# Altium PCB STM32.PcbDoc (part 4 of 6)
Units mm, origin at the board's own origin, x right, y up, seen from the top; angles counter-clockwise.
Board outline 99.69 x 99.7 mm, 2 copper layers (Top Layer, Bottom Layer); 150 components, 142 nets, 668 pads, 273 vias.
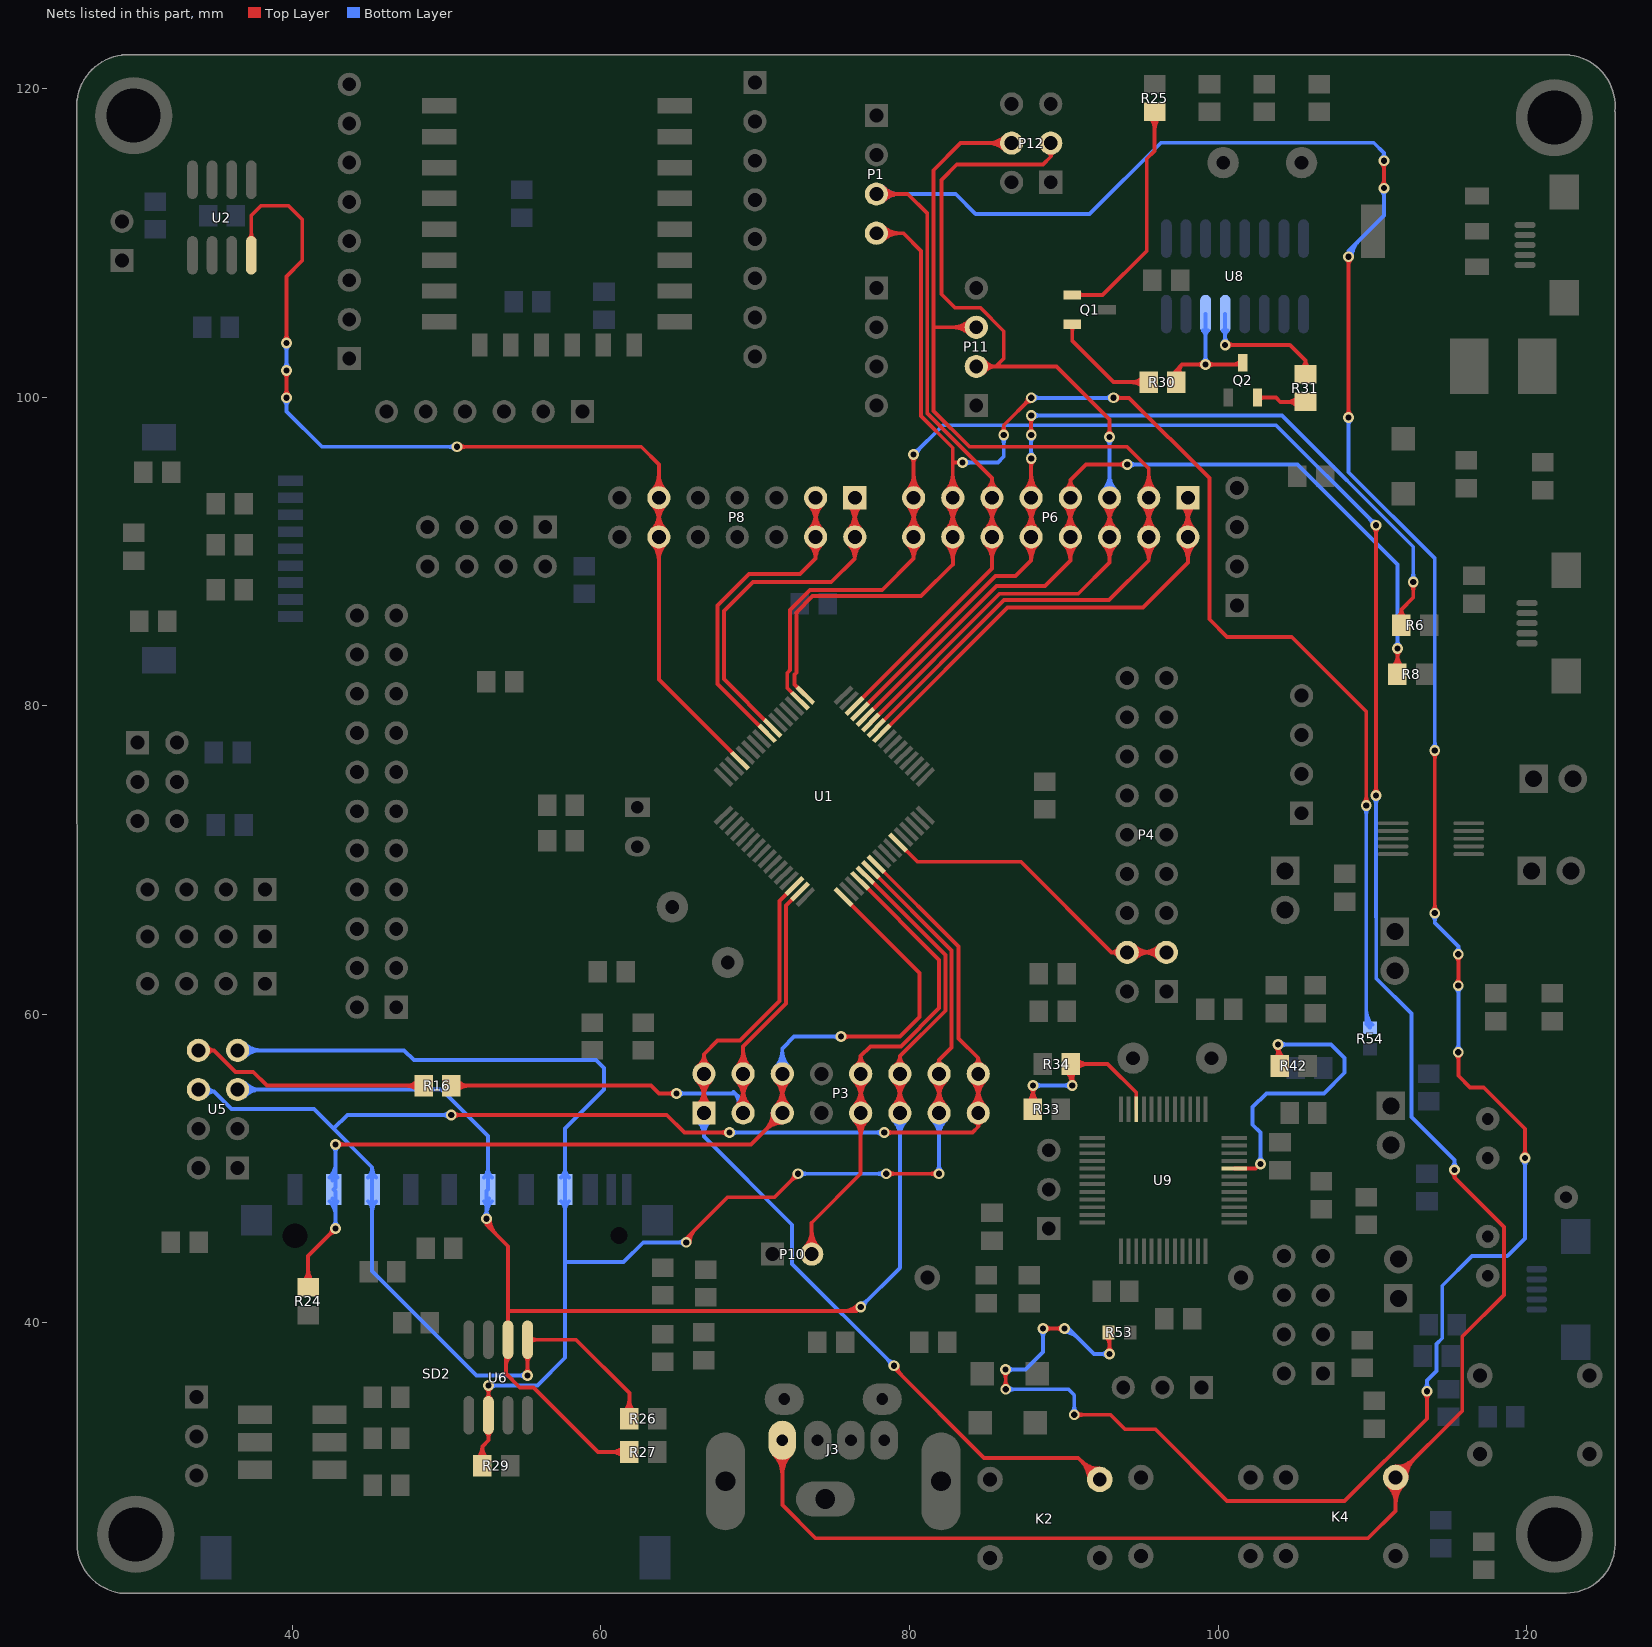
[diagram p4: the nets of this part, all layers, seen from the top]

## Via types
v1: diameter 0.7, hole 0.4, Top Layer to Bottom Layer, 272 vias
v2: diameter 1.27, hole 0.711, Top Layer to Bottom Layer, 1 vias

## Nets (pads, with @x,y where several pads share a name; then routed paths per layer and width w, separated by ;. In a path a pad name is that pad's centre, name@x,y a point inside that pad or via, vN(x,y) a via of type N, cw(c..) or ccw(c..) an arc to the next point about the centre after c; other vN are vias at no path point) (continued)
NetQ1_1: Q1.1 R25.1 | length 17.7
  Top Layer w0.25: Q1.1@90.551,106.614 92.517,106.614 95.377,109.474 95.377,115.443 95.885,115.951 R25.1@95.885,118.48 ; Q1.1@90.95,106.49 cw(c91.248,106.192) 91.248,106.614 cw(c91.248,107.036) Q1.1@90.95,106.738 ; R25.1@95.549,118.144 cw(c94.738,117.333) 95.885,117.333 cw(c97.032,117.333) R25.1@96.221,118.144
NetQ1_2: Q1.2 R30.1 | length 9.6
  Top Layer w0.25: Q1.2@90.427,104.59 cw(c90.129,104.292) 90.551,104.292 cw(c90.973,104.292) Q1.2@90.675,104.59 ; Q1.2@90.551,104.714 90.551,103.632 93.218,100.965 R30.1@95.493,100.965 ; R30.1@95.157,100.629 ccw(c94.346,99.818) 94.346,100.965 ccw(c94.346,102.112) R30.1@95.157,101.301
NetQ2_2: Q2.2 R31.1 | length 5.8
  Top Layer w0.25: Q2.2@102.55,99.967 103.741,99.967 104.024,99.684 R31.1@105.664,99.684 R31.1@105.664,99.568 ; Q2.2@102.674,99.843 cw(c102.972,99.544) 102.972,99.967 cw(c102.972,100.389) Q2.2@102.674,100.091 ; R31.1@105.228,99.348 ccw(c104.417,98.537) 104.417,99.684 ccw(c104.417,100.831) R31.1@105.228,100.02
NetQ2_3: Q2.3 R30.2 U8.14 | length 15.4
  Top Layer w0.25: R30.2@97.134,101.513 ccw(c97.054,101.738) 97.293,101.738 ; R30.2@97.274,101.048 cw(c97.645,101.383) 97.292,101.737 ; R30.2@97.293,100.965 97.293,101.738 ; R30.2@97.452,101.513 cw(c97.532,101.738) 97.293,101.738 ; R30.2@97.46,101.216 cw(c97.84,101.56) 97.477,101.922 ; R30.2@97.645,101.384 cw(c98.034,101.737) 97.663,102.108 ; v1@99.028,101.949 ccw(c98.644,101.565) 98.644,102.108 ccw(c98.644,102.651) v1@99.028,102.267 ; v1@99.346,101.949 cw(c99.73,101.565) 99.73,102.108 cw(c99.73,102.651) v1@99.346,102.267 ; 100.914,102.108 ccw(c100.914,102.903) Q2.3@101.476,102.341 ; Q2.3@101.491,102.108 v1(99.187,102.108) 97.663,102.108 ; 97.293,101.738 97.663,102.108
  Bottom Layer w0.25: v1@99.028,102.267 ccw(c98.644,102.651) 99.187,102.651 ccw(c99.73,102.651) v1@99.346,102.267 ; U8.14@99.028,104.314 cw(c98.644,103.93) 99.187,103.93 cw(c99.73,103.93) U8.14@99.346,104.314 ; v1(99.187,102.108) U8.14@99.187,105.373
NetR16_1: R16.1 U5.8 | length 18.5
  Top Layer w0.254: U5.8@33.909,57.658 34.925,57.658 ; U5.8@34.464,57.375 cw(c34.925,57.141) 34.925,57.658 ; U5.8@34.464,57.941 ccw(c34.925,58.175) 34.925,57.658 ; R16.1@48.169,55.038 ccw(c47.361,54.23) 47.361,55.372 ccw(c47.361,56.514) R16.1@48.169,55.706 ; R16.1@48.503,55.372 38.354,55.372 37.465,56.261 36.322,56.261 34.925,57.658
NetR31_2: R31.2 U8.13 | length 12.2
  Top Layer w0.25: v1(100.457,103.378) 104.648,103.378 105.664,102.362 ; v1@100.616,103.219 cw(c101,102.835) 101,103.378 cw(c101,103.921) v1@100.616,103.537 ; R31.2@105.404,101.882 ccw(c105.09,102.362) 105.664,102.362 ; R31.2@105.664,101.484 105.664,102.362 ; R31.2@105.924,101.882 cw(c106.238,102.362) 105.664,102.362
  Bottom Layer w0.25: v1@100.298,103.537 ccw(c99.914,103.921) 100.457,103.921 ccw(c101,103.921) v1@100.616,103.537 ; U8.13@100.298,104.314 cw(c99.914,103.93) 100.457,103.93 cw(c101,103.93) U8.13@100.616,104.314 ; v1(100.457,103.378) U8.13@100.457,105.373
NetR33_1: R33.1 R34.2 U9.10 | length 20.7
  Top Layer w0.254: R33.1@87.666,54.282 ccw(c86.858,55.09) 88,55.09 ccw(c89.142,55.09) R33.1@88.334,54.282 ; v1@87.853,55.214 cw(c87.499,54.86) 88,54.86 ; R33.1@88,53.848 88,55.361 v1(88.011,55.372) ; 88,54.807 cw(c88.576,54.807) v1@88.169,55.214 ; R34.2@90.123,56.314 cw(c89.29,55.367) v1@90.551,55.367 ; R34.2@90.29,56.505 cw(c89.784,55.928) 90.551,55.928 ; v1@90.393,55.53 ccw(c90.013,55.91) 90.551,55.91 ccw(c91.089,55.91) v1@90.709,55.53 ; R34.2@90.435,56.769 92.837,56.769 94.694,54.912 U9.10@94.694,53.837 ; v1(90.551,55.372) R34.2@90.551,56.653 ; 90.551,55.807 cw(c91.297,55.807) R34.2@90.769,56.335 ; R34.2@90.769,56.435 cw(c91.577,55.627) 91.577,56.769 cw(c91.577,57.911) R34.2@90.769,57.103
  Bottom Layer w0.254: v1(88.011,55.372) v1(90.551,55.372) ; v1@88.169,55.214 cw(c88.549,54.834) 88.549,55.372 cw(c88.549,55.91) v1@88.169,55.53 ; v1@90.393,55.214 ccw(c90.013,54.834) 90.013,55.372 ccw(c90.013,55.91) v1@90.393,55.53
NetR42_2: R42.2 U9.44 | length 24.5
  Top Layer w0.254: U9.44@101.044,49.987 102.438,49.987 v1(102.743,50.292) ; R42.2@103.668,57.076 ccw(c103.14,57.604) 103.886,57.604 ; v1@103.728,57.881 cw(c103.348,57.501) 103.886,57.501 cw(c104.424,57.501) v1@104.044,57.881 ; 103.886,57.48 ccw(c104.647,57.48) R42.2@104.146,56.907 ; R42.2@104.002,56.642 103.886,56.758 v1(103.886,58.039) ccw(c105.135,58.039) R42.2@104.313,57.098
  Bottom Layer w0.254: v1@102.585,50.45 ccw(c102.205,50.83) 102.743,50.83 ccw(c103.281,50.83) v1@102.901,50.45 ; v1(102.743,50.292) 102.743,52.324 102.235,52.832 102.235,53.975 103.124,54.864 106.862,54.864 108.204,56.206 108.204,57.15 107.315,58.039 v1(103.886,58.039) ; v1@104.044,57.881 cw(c104.424,57.501) 104.424,58.039 cw(c104.424,58.577) v1@104.044,58.197
NIRQ: P3.3 P3.4 R16.2 U1.15 | length 54.2
  Top Layer w0.25: P3.3@68.773,54.036 ccw(c67.706,55.103) 69.215,55.103 ccw(c70.724,55.103) P3.3@69.657,54.036 ; P3.4@68.773,55.692 cw(c67.706,54.625) 69.215,54.625 cw(c70.724,54.625) P3.4@69.657,55.692 ; P3.3@68.95,53.859 ccw(c68.31,54.499) 69.215,54.499 ccw(c70.12,54.499) P3.3@69.48,53.859 ; P3.4@68.95,55.869 cw(c68.31,55.229) 69.215,55.229 cw(c70.12,55.229) P3.4@69.48,55.869 ; P3.3@69.215,53.594 P3.4@69.215,56.134
  Top Layer w0.254: R16.2@50.303,55.372 63.246,55.372 63.754,54.864 v1(64.897,54.864) ; R16.2@50.637,55.038 cw(c51.445,54.23) 51.445,55.372 cw(c51.445,56.514) R16.2@50.637,55.706 ; v1@64.739,54.706 ccw(c64.359,54.326) 64.359,54.864 ccw(c64.359,55.402) v1@64.739,55.022 ; P3.4@68.774,56.575 ccw(c67.711,57.638) 69.215,57.638 ccw(c70.719,57.638) P3.4@69.656,56.575 ; P3.4@68.954,56.395 ccw(c68.324,57.025) 69.215,57.025 ccw(c70.106,57.025) P3.4@69.476,56.395 ; P3.4@69.215,56.134 69.215,57.912 71.984,60.681 71.984,67.037 U1.15@72.895,67.948
  Bottom Layer w0.254: v1(64.897,54.864) 68.707,54.864 69.215,54.356 P3.3@69.215,53.594 ; v1@65.055,54.706 cw(c65.435,54.326) 65.435,54.864 cw(c65.435,55.402) v1@65.055,55.022 ; 68.604,54.967 cw(c67.777,54.14) P3.3@68.87,53.725 ; 68.881,54.69 cw(c68.179,53.987) P3.3@69.107,53.635 ; 69.159,54.412 cw(c68.582,53.835) P3.3@69.345,53.545
PA0: K2.2 P3.1 P3.2 U1.14 | length 76.1
  Top Layer w0.25: P3.1@66.233,54.036 ccw(c65.166,55.103) 66.675,55.103 ccw(c68.184,55.103) P3.1@67.117,54.036 ; P3.2@66.233,55.692 cw(c65.166,54.625) 66.675,54.625 cw(c68.184,54.625) P3.2@67.117,55.692 ; P3.2@66.294,56.629 ccw(c65.697,57.404) 66.675,57.404 ; P3.1@66.41,53.859 ccw(c65.77,54.499) 66.675,54.499 ccw(c67.58,54.499) P3.1@66.94,53.859 ; P3.2@66.41,55.869 cw(c65.77,55.229) 66.675,55.229 cw(c67.58,55.229) P3.2@66.94,55.869 ; P3.2@66.446,56.431 ccw(c66.088,56.896) 66.675,56.896 ccw(c67.262,56.896) P3.2@66.904,56.431 ; P3.1@66.675,53.594 P3.2@66.675,56.134 66.675,57.404 ; P3.2@67.056,56.629 cw(c67.653,57.404) 66.675,57.404 ; U1.14@72.541,68.302 71.579,67.34 71.579,60.848 69.024,58.293 67.564,58.293 66.675,57.404 ; v1(78.994,37.211) 78.994,37.084 84.836,31.242 90.932,31.242 K2.2@92.329,29.845 ; v1@79.219,37.211 ccw(c80.069,37.211) 79.468,36.61 ; K2.2@91.628,29.845 ccw(c89.935,29.845) 91.132,31.042 ccw(c92.329,32.239) K2.2@92.329,30.546 ; K2.2@91.878,29.845 ccw(c90.789,29.845) 91.559,30.615 ccw(c92.329,31.385) K2.2@92.329,30.296
  Bottom Layer w0.25: P3.1@66.233,53.152 cw(c65.166,52.085) 66.675,52.085 cw(c68.184,52.085) P3.1@67.117,53.152 ; P3.1@66.41,53.329 cw(c65.77,52.689) 66.675,52.689 cw(c67.58,52.689) P3.1@66.94,53.329 ; P3.1@66.675,53.594 66.675,52.07 72.39,46.355 72.39,43.815 v1(78.994,37.211) ; v1@78.769,37.211 ccw(c78.226,37.211) 78.61,37.595 ccw(c78.994,37.979) v1@78.994,37.436
PA3: P3.5 P3.6 R24.2 SD2.1 U1.17 | length 89.7
  Top Layer w0.25: R24.2@40.685,42.638 ccw(c39.874,43.449) 41.021,43.449 ccw(c42.168,43.449) R24.2@41.357,42.638 ; R24.2@41.021,42.302 41.021,44.323 v1(42.799,46.101) ; v1@42.574,46.101 cw(c42.031,46.101) 42.415,45.717 cw(c42.799,45.333) v1@42.799,45.876 ; v1(42.799,51.562) 69.723,51.562 P3.5@71.755,53.594 P3.6@71.755,56.134 ; v1@42.958,51.403 cw(c43.342,51.019) 43.342,51.562 cw(c43.342,52.105) v1@42.958,51.721 ; P3.5@71.13,53.594 cw(c69.621,53.594) 70.688,52.527 cw(c71.755,51.46) P3.5@71.755,52.969 ; P3.5@71.313,54.036 ccw(c70.246,55.103) 71.755,55.103 ccw(c73.264,55.103) P3.5@72.197,54.036 ; P3.6@71.313,55.692 cw(c70.246,54.625) 71.755,54.625 cw(c73.264,54.625) P3.6@72.197,55.692 ; P3.5@71.38,53.594 cw(c70.475,53.594) 71.115,52.954 cw(c71.755,52.314) P3.5@71.755,53.219 ; P3.5@71.49,53.859 ccw(c70.85,54.499) 71.755,54.499 ccw(c72.66,54.499) P3.5@72.02,53.859 ; P3.6@71.49,55.869 cw(c70.85,55.229) 71.755,55.229 cw(c72.66,55.229) P3.6@72.02,55.869 ; v1(75.565,58.547) 79.375,58.547 80.645,59.817 80.645,62.673 U1.17@75.723,67.595 ; v1@75.724,58.388 cw(c76.108,58.004) 76.108,58.547 cw(c76.108,59.09) v1@75.724,58.706
  Bottom Layer w0.25: SD2.1@42.407,47.876 cw(c41.46,46.929) 42.799,46.929 ; SD2.1@42.407,49.406 ccw(c41.46,50.353) 42.799,50.353 ; SD2.1@42.584,48.053 cw(c42.064,47.533) 42.799,47.533 ; SD2.1@42.584,49.229 ccw(c42.064,49.749) 42.799,49.749 ; v1@42.64,46.26 ccw(c42.256,46.644) 42.799,46.644 ccw(c43.342,46.644) v1@42.958,46.26 ; v1@42.64,51.403 cw(c42.256,51.019) 42.799,51.019 cw(c43.342,51.019) v1@42.958,51.403 ; v1(42.799,46.101) 42.799,48.514 SD2.1@42.672,48.641 42.799,48.768 v1(42.799,51.562) ; 42.799,47.542 cw(c43.271,47.542) SD2.1@42.937,47.876 ; 42.799,49.74 ccw(c43.271,49.74) SD2.1@42.937,49.406 ; P3.6@71.313,56.576 ccw(c70.246,57.643) 71.755,57.643 ccw(c73.264,57.643) P3.6@72.197,56.576 ; P3.6@71.49,56.399 ccw(c70.85,57.039) 71.755,57.039 ccw(c72.66,57.039) P3.6@72.02,56.399 ; P3.6@71.755,56.134 71.755,57.785 72.517,58.547 v1(75.565,58.547) ; v1@75.406,58.388 ccw(c75.022,58.004) 75.022,58.547 ccw(c75.022,59.09) v1@75.406,58.706
PA4: P3.9 P3.10 P10.2 U1.20 | length 47.5
  Top Layer w0.25: P3.9@76.393,54.036 ccw(c75.326,55.103) 76.835,55.103 ccw(c78.344,55.103) P3.9@77.277,54.036 ; P3.10@76.393,55.692 cw(c75.326,54.625) 76.835,54.625 cw(c78.344,54.625) P3.10@77.277,55.692 ; P3.9@76.57,53.859 ccw(c75.93,54.499) 76.835,54.499 ccw(c77.74,54.499) P3.9@77.1,53.859 ; P3.10@76.57,55.869 cw(c75.93,55.229) 76.835,55.229 cw(c77.74,55.229) P3.10@77.1,55.869 ; P3.9@76.835,53.594 P3.10@76.835,56.134
  Top Layer w0.254: P10.2@73.219,44.891 ccw(c72.156,45.954) 73.66,45.954 ccw(c75.164,45.954) P10.2@74.101,44.891 ; P10.2@73.399,44.711 ccw(c72.769,45.341) 73.66,45.341 ccw(c74.551,45.341) P10.2@73.921,44.711 ; P10.2@73.66,44.45 73.66,46.482 76.835,49.657 P3.9@76.835,53.594 ; P3.9@76.394,53.153 cw(c75.331,52.09) 76.835,52.09 cw(c78.339,52.09) P3.9@77.276,53.153 ; P3.10@76.497,56.658 ccw(c76.098,57.277) 76.835,57.277 ; P3.9@76.574,53.333 cw(c75.944,52.703) 76.835,52.703 cw(c77.726,52.703) P3.9@77.096,53.333 ; U1.20@76.784,68.655 81.915,63.524 81.915,60.392 79.435,57.912 77.47,57.912 76.835,57.277 ; P3.10@76.835,56.134 76.835,57.277 ; P3.10@77.173,56.658 cw(c77.572,57.277) 76.835,57.277
PA5: P3.11 P3.12 R27.2 SD2.5 U1.21 U5.5 U6.6 | length 126.7
  Top Layer w0.25: 53.975,40.767 76.581,40.767 v1(76.835,41.021) ; 75.679,40.767 ccw(c75.679,42.177) v1@76.676,41.18 ; 76.282,40.767 ccw(c76.282,41.574) v1@76.853,41.003 ; P3.11@78.933,54.036 ccw(c77.866,55.103) 79.375,55.103 ccw(c80.884,55.103) P3.11@79.817,54.036 ; P3.12@78.933,55.692 cw(c77.866,54.625) 79.375,54.625 cw(c80.884,54.625) P3.12@79.817,55.692 ; P3.12@79.038,56.66 ccw(c78.642,57.277) 79.375,57.277 ; P3.11@79.11,53.859 ccw(c78.47,54.499) 79.375,54.499 ccw(c80.28,54.499) P3.11@79.64,53.859 ; P3.12@79.11,55.869 cw(c78.47,55.229) 79.375,55.229 cw(c80.28,55.229) P3.12@79.64,55.869 ; P3.11@79.375,53.594 79.375,57.277 ; P3.12@79.712,56.66 cw(c80.108,57.277) 79.375,57.277
  Top Layer w0.254: v1@52.547,46.736 ccw(c53.392,46.736) 52.794,46.139 ; v1(52.578,46.736) 52.578,46.355 53.975,44.958 53.975,40.767 U6.6@53.975,38.899 53.848,38.772 53.848,36.703 54.737,35.814 55.626,35.814 59.817,31.623 R27.2@61.838,31.623 ; v1@52.801,46.736 ccw(c54.259,46.736) 53.228,45.705 ; 53.848,37.154 cw(c54.82,37.154) U6.6@54.133,37.841 ; R27.2@61.504,31.289 ccw(c60.696,30.481) 60.696,31.623 ccw(c60.696,32.765) R27.2@61.504,31.957 ; U1.21@77.137,69.009 82.321,63.825 82.321,60.223 79.375,57.277
  Bottom Layer w0.25: v1(76.835,41.021) 79.375,43.561 P3.11@79.375,53.594 ; v1@76.835,41.246 ccw(c76.835,41.789) 77.219,41.405 ccw(c77.603,41.021) v1@77.06,41.021 ; P3.11@78.933,53.152 cw(c77.866,52.085) 79.375,52.085 cw(c80.884,52.085) P3.11@79.817,53.152 ; P3.11@79.11,53.329 cw(c78.47,52.689) 79.375,52.689 cw(c80.28,52.689) P3.11@79.64,53.329
  Bottom Layer w0.254: U5.5@36.449,55.118 49.657,55.118 52.672,52.103 SD2.5@52.672,48.641 52.578,48.547 v1(52.578,46.736) ; U5.5@36.71,54.857 cw(c37.34,54.227) 37.34,55.118 cw(c37.34,56.009) U5.5@36.71,55.379 ; U5.5@36.89,54.677 cw(c37.953,53.614) 37.953,55.118 cw(c37.953,56.622) U5.5@36.89,55.559 ; SD2.5@52.408,47.877 cw(c51.998,47.467) 52.578,47.467 ; SD2.5@52.408,49.405 ccw(c51.771,50.041) 52.672,50.041 ccw(c53.572,50.041) SD2.5@52.936,49.405 ; v1@52.42,46.894 ccw(c52.04,47.274) 52.578,47.274 ccw(c53.116,47.274) v1@52.736,46.894 ; v1@52.578,47.014 cw(c53.799,47.014) SD2.5@52.936,47.877 ; 52.578,47.627 cw(c53.186,47.627) SD2.5@52.756,48.057
PA6: P3.13 P3.14 R29.2 SD2.7 U1.22 U5.7 U6.2 | length 135.3
  Top Layer w0.25: v1@65.507,45.212 cw(c66.06,45.212) 65.669,45.603 ; v1(65.532,45.212) 65.532,45.466 68.199,48.133 71.247,48.133 v1(72.771,49.657) ; v1@65.757,45.212 cw(c66.913,45.212) 66.096,46.03 ; v1@72.546,49.657 cw(c72.003,49.657) 72.387,49.273 cw(c72.771,48.889) v1@72.771,49.432 ; v1(78.486,49.657) v1(81.915,49.657) ; v1@78.645,49.498 cw(c79.029,49.114) 79.029,49.657 cw(c79.029,50.2) v1@78.645,49.816 ; P3.13@81.473,54.036 ccw(c80.406,55.103) 81.915,55.103 ccw(c83.424,55.103) P3.13@82.357,54.036 ; P3.14@81.473,55.692 cw(c80.406,54.625) 81.915,54.625 cw(c83.424,54.625) P3.14@82.357,55.692 ; P3.13@81.65,53.859 ccw(c81.01,54.499) 81.915,54.499 ccw(c82.82,54.499) P3.13@82.18,53.859 ; P3.14@81.65,55.869 cw(c81.01,55.229) 81.915,55.229 cw(c82.82,55.229) P3.14@82.18,55.869 ; P3.14@81.703,56.722 ccw(c81.595,57.023) 81.915,57.023 ; v1@81.756,49.498 ccw(c81.372,49.114) 81.372,49.657 ccw(c81.372,50.2) v1@81.756,49.816 ; P3.13@81.915,53.594 81.915,57.023 ; P3.14@82.127,56.722 cw(c82.235,57.023) 81.915,57.023
  Top Layer w0.254: R29.2@51.979,31.168 ccw(c51.171,31.976) 52.313,31.976 ccw(c53.455,31.976) R29.2@52.647,31.168 ; R29.2@52.313,30.734 52.313,31.993 52.705,32.385 U6.2@52.705,33.999 v1(52.705,35.941) ; U6.2@52.547,32.941 cw(c52.166,32.561) 52.705,32.561 cw(c53.243,32.561) U6.2@52.863,32.941 ; U6.2@52.547,35.057 ccw(c52.166,35.438) 52.705,35.438 ; v1@52.547,35.783 cw(c52.167,35.403) 52.705,35.403 cw(c53.243,35.403) v1@52.863,35.783 ; 52.705,35.437 ccw(c53.243,35.437) U6.2@52.863,35.057 ; U1.22@77.491,69.362 82.728,64.126 82.728,57.836 81.915,57.023
  Bottom Layer w0.25: 57.672,43.942 61.468,43.942 62.738,45.212 v1(65.532,45.212) ; v1@65.373,45.053 ccw(c64.989,44.669) 64.989,45.212 ccw(c64.989,45.755) v1@65.373,45.371 ; v1(72.771,49.657) v1(78.486,49.657) ; v1@72.93,49.498 cw(c73.314,49.114) 73.314,49.657 cw(c73.314,50.2) v1@72.93,49.816 ; v1@78.327,49.498 ccw(c77.943,49.114) 77.943,49.657 ccw(c77.943,50.2) v1@78.327,49.816 ; P3.13@81.473,53.152 cw(c80.406,52.085) 81.915,52.085 cw(c83.424,52.085) P3.13@82.357,53.152 ; P3.13@81.65,53.329 cw(c81.01,52.689) 81.915,52.689 cw(c82.82,52.689) P3.13@82.18,53.329 ; v1@81.756,49.816 ccw(c81.372,50.2) 81.915,50.2 ccw(c82.458,50.2) v1@82.074,49.816 ; v1(81.915,49.657) P3.13@81.915,53.594
  Bottom Layer w0.254: U5.7@36.449,57.658 47.244,57.658 47.879,57.023 59.69,57.023 60.198,56.515 60.198,55.88 60.198,55.118 57.672,52.592 SD2.7@57.672,48.641 57.672,43.942 57.672,37.733 55.88,35.941 v1(52.705,35.941) ; U5.7@36.71,57.397 cw(c37.34,56.767) 37.34,57.658 cw(c37.34,58.549) U5.7@36.71,57.919 ; U5.7@36.89,57.217 cw(c37.953,56.154) 37.953,57.658 cw(c37.953,59.162) U5.7@36.89,58.099 ; v1@52.863,35.783 cw(c53.243,35.403) 53.243,35.941 cw(c53.243,36.479) v1@52.863,36.099 ; SD2.7@57.408,47.877 cw(c56.771,47.241) 57.672,47.241 cw(c58.572,47.241) SD2.7@57.936,47.877 ; SD2.7@57.408,49.405 ccw(c56.771,50.041) 57.672,50.041 ccw(c58.572,50.041) SD2.7@57.936,49.405
PA7: P3.15 P3.16 R26.2 SD2.2 U1.23 U5.6 U6.5 | length 131.2
  Top Layer w0.25: P3.15@84.013,54.036 ccw(c82.946,55.103) 84.455,55.103 ccw(c85.964,55.103) P3.15@84.897,54.036 ; P3.16@84.013,55.692 cw(c82.946,54.625) 84.455,54.625 cw(c85.964,54.625) P3.16@84.897,55.692 ; P3.16@84.173,56.692 ccw(c83.942,57.15) 84.455,57.15 ; P3.15@84.19,53.859 ccw(c83.55,54.499) 84.455,54.499 ccw(c85.36,54.499) P3.15@84.72,53.859 ; P3.16@84.19,55.869 cw(c83.55,55.229) 84.455,55.229 cw(c85.36,55.229) P3.16@84.72,55.869 ; P3.15@84.455,53.594 P3.16@84.455,56.134 84.455,57.15 ; P3.16@84.737,56.692 cw(c84.968,57.15) 84.455,57.15
  Top Layer w0.254: v1(50.292,53.467) 64.262,53.467 65.405,52.324 v1(68.326,52.324) ; v1@50.45,53.309 cw(c50.83,52.929) 50.83,53.467 cw(c50.83,54.005) v1@50.45,53.625 ; v1@55.087,36.734 ccw(c54.707,37.114) 55.245,37.114 ccw(c55.783,37.114) v1@55.403,36.734 ; U6.5@55.087,37.841 cw(c54.706,37.46) 55.245,37.46 ; v1(55.245,36.576) U6.5@55.245,38.899 58.383,38.899 61.838,35.444 R26.2@61.838,33.782 ; 55.245,37.461 cw(c55.783,37.461) U6.5@55.403,37.841 ; U6.5@55.403,38.741 cw(c55.783,38.361) 55.783,38.899 cw(c55.783,39.437) U6.5@55.403,39.057 ; R26.2@61.504,34.216 ccw(c60.696,35.024) 61.838,35.024 ccw(c62.98,35.024) R26.2@62.172,34.216 ; v1@68.168,52.166 ccw(c67.788,51.786) 67.788,52.324 ccw(c67.788,52.862) v1@68.168,52.482 ; U1.23@77.844,69.716 83.185,64.375 83.185,58.42 84.455,57.15 ; v1(78.359,52.324) 84.074,52.324 84.455,52.705 ; v1@78.517,52.166 cw(c78.897,51.786) 78.897,52.324 cw(c78.897,52.862) v1@78.517,52.482 ; P3.15@84.242,53.008 cw(c84.132,52.705) 84.455,52.705 ; P3.15@84.455,53.594 84.455,52.705 ; P3.15@84.668,53.008 ccw(c84.778,52.705) 84.455,52.705
  Bottom Layer w0.254: U5.6@33.909,55.118 34.036,54.991 34.925,54.991 ; U5.6@34.4,54.735 cw(c34.925,54.326) 34.925,54.991 ; U5.6@34.504,55.301 ccw(c34.925,55.431) 34.925,54.991 ; SD2.2@44.908,47.877 cw(c44.271,47.241) 45.172,47.241 cw(c46.072,47.241) SD2.2@45.436,47.877 ; SD2.2@44.908,49.405 ccw(c44.271,50.041) 45.172,50.041 ccw(c46.072,50.041) SD2.2@45.436,49.405 ; v1@50.134,53.309 ccw(c49.754,52.929) 49.754,53.467 ccw(c49.754,54.005) v1@50.134,53.625 ; v1(50.292,53.467) 43.561,53.467 42.673,52.579 ; v1@55.087,36.418 ccw(c54.707,36.038) 54.707,36.576 ccw(c54.707,37.114) v1@55.087,36.734 ; v1(55.245,36.576) 51.943,36.576 45.172,43.347 SD2.2@45.172,48.641 45.172,50.079 42.673,52.579 ; v1(68.326,52.324) v1(78.359,52.324) ; v1@68.484,52.166 cw(c68.864,51.786) 68.864,52.324 cw(c68.864,52.862) v1@68.484,52.482 ; v1@78.201,52.166 ccw(c77.821,51.786) 77.821,52.324 ccw(c77.821,52.862) v1@78.201,52.482 ; 34.925,54.991 36.068,53.848 41.403,53.848 42.673,52.579
PA8: P6.1 P6.2 U1.41 | length 40
  Top Layer w0.25: U1.41@78.198,78.201 86.357,86.36 95.123,86.36 98.044,89.281 P6.2@98.044,90.932 P6.1@98.044,93.472 ; P6.2@97.602,90.49 cw(c96.535,89.423) 98.044,89.423 cw(c99.553,89.423) P6.2@98.486,90.49 ; P6.2@97.602,91.374 ccw(c96.535,92.441) 98.044,92.441 ccw(c99.553,92.441) P6.2@98.486,91.374 ; P6.1@97.602,93.03 cw(c96.535,91.963) 98.044,91.963 cw(c99.553,91.963) P6.1@98.486,93.03 ; P6.2@97.779,90.667 cw(c97.139,90.027) 98.044,90.027 cw(c98.949,90.027) P6.2@98.309,90.667 ; P6.2@97.779,91.197 ccw(c97.139,91.837) 98.044,91.837 ccw(c98.949,91.837) P6.2@98.309,91.197 ; P6.1@97.779,93.207 cw(c97.139,92.567) 98.044,92.567 cw(c98.949,92.567) P6.1@98.309,93.207
PA9: P6.3 P6.4 P11.3 P12.4 U1.42 | length 90.5
  Top Layer w0.25: P11.3@83.886,104.079 ccw(c82.819,103.012) 82.819,104.521 ccw(c82.819,106.03) P11.3@83.886,104.963 ; P11.3@84.063,104.256 ccw(c83.423,103.616) 83.423,104.521 ccw(c83.423,105.426) P11.3@84.063,104.786 ; P11.3@84.328,104.521 81.555,104.521 ; P12.4@86.172,116.017 ccw(c85.105,114.95) 85.105,116.459 ccw(c85.105,117.968) P12.4@86.172,116.901 ; P12.4@86.349,116.194 ccw(c85.709,115.554) 85.709,116.459 ccw(c85.709,117.364) P12.4@86.349,116.724 ; P12.4@86.614,116.459 83.312,116.459 81.555,114.702 81.555,104.521 ; P6.4@95.062,91.374 ccw(c93.995,92.441) 95.504,92.441 ccw(c97.013,92.441) P6.4@95.946,91.374 ; P6.3@95.062,93.03 cw(c93.995,91.963) 95.504,91.963 cw(c97.013,91.963) P6.3@95.946,93.03 ; P6.3@95.062,93.914 ccw(c93.995,94.981) 95.504,94.981 ccw(c97.013,94.981) P6.3@95.946,93.914 ; P6.4@95.239,91.197 ccw(c94.599,91.837) 95.504,91.837 ccw(c96.409,91.837) P6.4@95.769,91.197 ; P6.3@95.239,93.207 cw(c94.599,92.567) 95.504,92.567 cw(c96.409,92.567) P6.3@95.769,93.207 ; P6.3@95.239,93.737 ccw(c94.599,94.377) 95.504,94.377 ccw(c96.409,94.377) P6.3@95.769,93.737 ; P6.4@95.504,90.932 P6.3@95.504,93.472 95.504,95.377 94.107,96.774 83.881,96.774 81.555,99.1 81.555,104.521
  Top Layer w0.254: U1.42@77.844,78.555 86.134,86.845 92.941,86.845 95.504,89.408 P6.4@95.504,90.932 ; P6.4@95.063,90.491 cw(c94,89.428) 95.504,89.428 cw(c97.008,89.428) P6.4@95.945,90.491 ; P6.4@95.243,90.671 cw(c94.613,90.041) 95.504,90.041 cw(c96.395,90.041) P6.4@95.765,90.671
PA10: P6.5 P6.6 P11.2 P12.3 U1.43 | length 83.2
  Top Layer w0.25: U1.43@77.491,78.908 85.832,87.249 90.932,87.249 92.964,89.281 P6.6@92.964,90.932 P6.5@92.964,93.472 ; P11.2@84.328,101.981 85.598,101.981 ; P11.2@84.625,101.752 cw(c85.09,101.394) 85.09,101.981 cw(c85.09,102.568) P11.2@84.625,102.21 ; P11.2@84.823,101.6 cw(c85.598,101.003) 85.598,101.981 ; P11.2@84.823,102.362 ccw(c85.598,102.959) 85.598,101.981 ; P12.3@88.942,115.871 cw(c88.834,115.57) 89.154,115.57 ; P12.3@89.154,116.459 89.154,115.57 ; P12.3@89.366,115.871 ccw(c89.474,115.57) 89.154,115.57 ; P6.6@92.522,90.49 cw(c91.455,89.423) 92.964,89.423 cw(c94.473,89.423) P6.6@93.406,90.49 ; P6.6@92.522,91.374 ccw(c91.455,92.441) 92.964,92.441 ccw(c94.473,92.441) P6.6@93.406,91.374 ; P6.5@92.522,93.03 cw(c91.455,91.963) 92.964,91.963 cw(c94.473,91.963) P6.5@93.406,93.03 ; P6.6@92.699,90.667 cw(c92.059,90.027) 92.964,90.027 cw(c93.869,90.027) P6.6@93.229,90.667 ; P6.6@92.699,91.197 ccw(c92.059,91.837) 92.964,91.837 ccw(c93.869,91.837) P6.6@93.229,91.197 ; P6.5@92.699,93.207 cw(c92.059,92.567) 92.964,92.567 cw(c93.869,92.567) P6.5@93.229,93.207 ; v1@92.805,97.568 ccw(c92.421,97.952) 92.964,97.952 ccw(c93.507,97.952) v1@93.123,97.568 ; v1(92.964,97.409) 92.964,98.552 89.535,101.981 85.598,101.981 ; 85.598,101.981 86.106,102.489 86.106,104.267 84.582,105.791 82.931,105.791 82.063,106.659 82.063,114.067 83.058,115.062 88.646,115.062 89.154,115.57
  Bottom Layer w0.25: P6.5@92.522,93.914 ccw(c91.455,94.981) 92.964,94.981 ccw(c94.473,94.981) P6.5@93.406,93.914 ; P6.5@92.699,93.737 ccw(c92.059,94.377) 92.964,94.377 ccw(c93.869,94.377) P6.5@93.229,93.737 ; v1@92.805,97.25 cw(c92.421,96.866) 92.964,96.866 cw(c93.507,96.866) v1@93.123,97.25 ; P6.5@92.964,93.472 v1(92.964,97.409)
PA11: P6.7 P6.8 R8.1 U1.44 | length 72.2
  Top Layer w0.25: P6.8@89.982,91.374 ccw(c88.915,92.441) 90.424,92.441 ccw(c91.933,92.441) P6.8@90.866,91.374 ; P6.7@89.982,93.03 cw(c88.915,91.963) 90.424,91.963 cw(c91.933,91.963) P6.7@90.866,93.03 ; P6.7@90.087,93.998 ccw(c89.691,94.615) 90.424,94.615 ; P6.8@90.159,91.197 ccw(c89.519,91.837) 90.424,91.837 ccw(c91.329,91.837) P6.8@90.689,91.197 ; P6.7@90.159,93.207 cw(c89.519,92.567) 90.424,92.567 cw(c91.329,92.567) P6.7@90.689,93.207 ; P6.8@90.424,90.932 P6.7@90.424,93.472 90.424,94.615 ; P6.7@90.761,93.998 cw(c91.157,94.615) 90.424,94.615 ; v1@93.948,95.472 ccw(c93.564,95.088) 93.564,95.631 ccw(c93.564,96.174) v1@93.948,95.79 ; v1(94.107,95.631) 91.44,95.631 90.424,94.615 ; R8.1@111.286,82.478 ccw(c110.449,83.315) 111.633,83.315 ; v1@111.474,83.534 cw(c111.09,83.15) 111.633,83.15 cw(c112.176,83.15) v1@111.792,83.534 ; R8.1@111.622,82.042 111.633,82.053 v1(111.633,83.693) ; 111.633,83.262 ccw(c112.742,83.262) R8.1@111.958,82.478
  Top Layer w0.254: U1.44@77.137,79.262 85.632,87.757 88.773,87.757 90.424,89.408 P6.8@90.424,90.932 ; P6.8@89.983,90.491 cw(c88.92,89.428) 90.424,89.428 cw(c91.928,89.428) P6.8@90.865,90.491 ; P6.8@90.163,90.671 cw(c89.533,90.041) 90.424,90.041 cw(c91.315,90.041) P6.8@90.685,90.671
  Bottom Layer w0.25: v1(94.107,95.631) 105.156,95.631 111.633,89.154 v1(111.633,83.693) ; v1@94.266,95.472 cw(c94.65,95.088) 94.65,95.631 cw(c94.65,96.174) v1@94.266,95.79 ; v1@111.474,83.852 ccw(c111.09,84.236) 111.633,84.236 ccw(c112.176,84.236) v1@111.792,83.852
PA12: P6.9 P6.10 R6.1 U1.45 | length 81.4
  Top Layer w0.25: P6.10@87.442,91.374 ccw(c86.375,92.441) 87.884,92.441 ccw(c89.393,92.441) P6.10@88.326,91.374 ; P6.9@87.442,93.03 cw(c86.375,91.963) 87.884,91.963 cw(c89.393,91.963) P6.9@88.326,93.03 ; P6.10@87.619,91.197 ccw(c86.979,91.837) 87.884,91.837 ccw(c88.789,91.837) P6.10@88.149,91.197 ; P6.9@87.619,93.207 cw(c86.979,92.567) 87.884,92.567 cw(c88.789,92.567) P6.9@88.149,93.207 ; P6.10@87.884,90.932 P6.9@87.884,93.472
  Top Layer w0.254: U1.45@76.784,79.616 85.56,88.392 86.868,88.392 87.884,89.408 P6.10@87.884,90.932 ; P6.10@87.443,90.491 cw(c86.38,89.428) 87.884,89.428 cw(c89.388,89.428) P6.10@88.325,90.491 ; P6.9@87.443,93.913 ccw(c86.38,94.976) 87.884,94.976 ccw(c89.388,94.976) P6.9@88.325,93.913 ; P6.10@87.623,90.671 cw(c86.993,90.041) 87.884,90.041 cw(c88.775,90.041) P6.10@88.145,90.671 ; P6.9@87.623,93.733 ccw(c86.993,94.363) 87.884,94.363 ccw(c88.775,94.363) P6.9@88.145,93.733 ; v1@87.726,95.854 cw(c87.346,95.474) 87.884,95.474 cw(c88.422,95.474) v1@88.042,95.854 ; v1@87.726,97.694 ccw(c87.346,98.074) 87.884,98.074 ccw(c88.422,98.074) v1@88.042,97.694 ; v1@87.726,98.648 cw(c87.346,98.268) 87.884,98.268 cw(c88.422,98.268) v1@88.042,98.648 ; v1(87.884,96.012) P6.9@87.884,93.472 P6.9@88.011,93.599 ; v1(87.884,97.536) v1(87.884,98.806) ; R6.1@111.606,85.705 ccw(c111.247,86.222) 111.876,86.222 ; R6.1@111.876,85.217 111.876,86.222 ; R6.1@112.146,85.705 cw(c112.505,86.222) 111.876,86.222 ; v1@112.491,87.853 cw(c112.111,87.473) 112.649,87.473 cw(c113.187,87.473) v1@112.807,87.853 ; v1(112.649,88.011) 112.649,86.995 111.876,86.222
  Bottom Layer w0.254: v1@87.726,96.17 ccw(c87.346,96.55) 87.884,96.55 ccw(c88.422,96.55) v1@88.042,96.17 ; v1@87.726,97.378 cw(c87.346,96.998) 87.884,96.998 cw(c88.422,96.998) v1@88.042,97.378 ; v1(87.884,96.012) v1(87.884,97.536) ; v1@88.011,98.806 104.14,98.806 112.649,90.297 v1(112.649,88.011) ; v1@88.042,98.648 cw(c88.422,98.268) 88.422,98.806 cw(c88.422,99.344) v1@88.042,98.964 ; v1@112.491,88.169 ccw(c112.111,88.549) 112.649,88.549 ccw(c113.187,88.549) v1@112.807,88.169
PA13: P1.3 P6.11 P6.12 R53.1 U1.46 | length 267.1
  Top Layer w0.25: P1.3@77.851,113.157 79.883,113.157 81.153,111.887 81.153,98.933 85.344,94.742 ; P1.3@78.116,112.892 cw(c78.756,112.252) 78.756,113.157 cw(c78.756,114.062) P1.3@78.116,113.422 ; P1.3@78.293,112.715 cw(c79.36,111.648) 79.36,113.157 cw(c79.36,114.666) P1.3@78.293,113.599 ; P6.12@84.902,91.374 ccw(c83.835,92.441) 85.344,92.441 ccw(c86.853,92.441) P6.12@85.786,91.374 ; P6.11@84.902,93.03 cw(c83.835,91.963) 85.344,91.963 cw(c86.853,91.963) P6.11@85.786,93.03 ; P6.11@84.963,93.967 ccw(c84.366,94.742) 85.344,94.742 ; P6.12@85.079,91.197 ccw(c84.439,91.837) 85.344,91.837 ccw(c86.249,91.837) P6.12@85.609,91.197 ; P6.11@85.079,93.207 cw(c84.439,92.567) 85.344,92.567 cw(c86.249,92.567) P6.11@85.609,93.207 ; P6.11@85.115,93.769 ccw(c84.757,94.234) 85.344,94.234 ccw(c85.931,94.234) P6.11@85.573,93.769 ; P6.12@85.344,90.932 P6.11@85.344,93.472 85.344,94.742 ; P6.11@85.725,93.967 cw(c86.322,94.742) 85.344,94.742 ; v1@86.057,36.814 cw(c85.632,36.389) 86.233,36.389 ; v1@86.074,35.846 ccw(c85.69,36.23) 86.233,36.23 ccw(c86.776,36.23) v1@86.392,35.846 ; v1(86.233,35.687) v1@86.233,36.973 ; 86.233,36.47 cw(c86.718,36.47) v1@86.375,36.814 ; v1(88.646,39.624) v1(90.043,39.624) ; v1@88.805,39.465 cw(c89.189,39.081) 89.189,39.624 cw(c89.189,40.167) v1@88.805,39.783 ; v1@89.884,39.465 ccw(c89.5,39.081) 89.5,39.624 ccw(c89.5,40.167) v1@89.884,39.783 ; v1(90.678,34.036) 93.029,34.036 93.966,33.098 95.934,33.098 100.584,28.448 108.204,28.448 113.538,33.782 v1(113.538,35.56) ; v1@90.837,33.877 cw(c91.221,33.493) 91.221,34.036 cw(c91.221,34.579) v1@90.837,34.195 ; R53.1@92.705,39.126 cw(c92.078,38.499) 92.964,38.499 ; v1@92.805,38.132 ccw(c92.421,38.516) 92.964,38.516 ccw(c93.507,38.516) v1@93.123,38.132 ; R53.1@92.899,39.37 92.964,39.305 v1(92.964,37.973) ; 92.964,38.813 cw(c93.406,38.813) R53.1@93.093,39.126 ; v1@108.299,98.838 ccw(c107.915,99.222) 108.458,99.222 ccw(c109.001,99.222) v1@108.617,98.838 ; v1@108.299,108.934 cw(c107.915,108.55) 108.458,108.55 cw(c109.001,108.55) v1@108.617,108.934 ; v1(108.458,98.679) v1(108.458,109.093) ; v1@110.585,113.697 ccw(c110.201,114.081) 110.744,114.081 ccw(c111.287,114.081) v1@110.903,113.697 ; v1@110.585,115.157 cw(c110.201,114.773) 110.744,114.773 cw(c111.287,114.773) v1@110.903,115.157 ; v1(110.744,113.538) v1(110.744,115.316) ; v1@113.379,35.401 cw(c112.995,35.017) 113.538,35.017 cw(c114.081,35.017) v1@113.697,35.401 ; v1@113.887,66.707 ccw(c113.503,67.091) 114.046,67.091 ccw(c114.589,67.091) v1@114.205,66.707 ; v1@113.887,76.93 cw(c113.503,76.546) 114.046,76.546 cw(c114.589,76.546) v1@114.205,76.93 ; v1(114.046,66.548) v1(114.046,77.089) ; v1@115.411,57.372 cw(c115.027,56.988) 115.57,56.988 cw(c116.113,56.988) v1@115.729,57.372 ; v1@115.411,62.008 ccw(c115.027,62.392) 115.57,62.392 ccw(c116.113,62.392) v1@115.729,62.008 ; v1@115.411,63.722 cw(c115.027,63.338) 115.57,63.338 cw(c116.113,63.338) v1@115.729,63.722 ; v1(115.57,57.531) 115.57,56.007 116.332,55.245 117.221,55.245 119.888,52.578 v1(119.888,50.673) ; v1(115.57,61.849) v1(115.57,63.881) ; v1@119.729,50.832 ccw(c119.345,51.216) 119.888,51.216 ccw(c120.431,51.216) v1@120.047,50.832
  Top Layer w0.254: U1.46@76.43,79.969 85.344,88.883 P6.12@85.344,90.932 ; P6.12@84.903,90.491 cw(c83.84,89.428) 85.344,89.428 cw(c86.848,89.428) P6.12@85.785,90.491 ; P6.12@85.083,90.671 cw(c84.453,90.041) 85.344,90.041 cw(c86.235,90.041) P6.12@85.605,90.671
  Bottom Layer w0.25: P1.3@77.851,113.157 82.994,113.157 84.287,111.864 91.671,111.864 96.289,116.482 110.086,116.482 110.744,115.824 ; P1.3@78.116,112.892 cw(c78.756,112.252) 78.756,113.157 cw(c78.756,114.062) P1.3@78.116,113.422 ; P1.3@78.293,112.715 cw(c79.36,111.648) 79.36,113.157 cw(c79.36,114.666) P1.3@78.293,113.599 ; v1(86.216,36.973) 87.519,36.973 88.646,38.1 v1(88.646,39.624) ; v1(86.233,35.687) 90.297,35.687 90.678,35.306 v1(90.678,34.036) ; v1@86.375,36.814 cw(c86.759,36.43) 86.759,36.973 cw(c86.759,37.516) v1@86.375,37.132 ; v1@86.392,35.528 cw(c86.776,35.144) 86.776,35.687 cw(c86.776,36.23) v1@86.392,35.846 ; v1@88.487,39.465 cw(c88.103,39.081) 88.646,39.081 cw(c89.189,39.081) v1@88.805,39.465 ; v1@90.043,39.399 cw(c90.043,38.243) 90.861,39.06 ; v1(90.043,39.624) 90.297,39.624 91.948,37.973 v1(92.964,37.973) ; v1@90.043,39.649 cw(c90.043,39.096) 90.434,39.487 ; v1@90.519,34.195 ccw(c90.135,34.579) 90.678,34.579 ccw(c91.221,34.579) v1@90.837,34.195 ; v1@92.805,37.814 ccw(c92.421,37.43) 92.421,37.973 ccw(c92.421,38.516) v1@92.805,38.132 ; v1@108.299,98.52 cw(c107.915,98.136) 108.458,98.136 cw(c109.001,98.136) v1@108.617,98.52 ; v1@108.433,109.093 cw(c109.292,109.093) 108.685,109.701 ; v1(108.458,98.679) 108.458,95.123 114.046,89.535 v1(114.046,77.089) ; 108.458,109.474 110.744,111.76 v1(110.744,113.538) ; v1@108.683,109.093 cw(c110.146,109.093) 109.112,110.128 ; v1@110.585,113.379 cw(c110.201,112.995) 110.744,112.995 cw(c111.287,112.995) v1@110.903,113.379 ; v1@110.593,115.483 ccw(c110.283,115.824) 110.744,115.824 ; v1(110.744,115.316) 110.744,115.824 ; v1@110.895,115.483 cw(c111.205,115.824) 110.744,115.824 ; v1@113.379,35.719 ccw(c112.995,36.103) 113.538,36.103 ccw(c114.081,36.103) v1@113.697,35.719 ; v1(113.538,35.56) 113.538,36.256 114.15,36.869 114.15,38.616 114.531,38.997 114.531,42.395 116.459,44.323 118.745,44.323 119.888,45.466 v1(119.888,50.673) ; v1@113.887,66.389 cw(c113.503,66.005) 114.046,66.005 cw(c114.589,66.005) v1@114.205,66.389 ; v1@113.887,77.248 ccw(c113.503,77.632) 114.046,77.632 ccw(c114.589,77.632) v1@114.205,77.248 ; v1(114.046,66.548) 114.046,65.913 115.57,64.389 ; v1@115.411,57.69 ccw(c115.027,58.074) 115.57,58.074 ccw(c116.113,58.074) v1@115.729,57.69 ; v1@115.411,61.69 cw(c115.027,61.306) 115.57,61.306 cw(c116.113,61.306) v1@115.729,61.69 ; v1@115.419,64.048 ccw(c115.109,64.389) 115.57,64.389 ; v1(115.57,57.531) v1(115.57,61.849) ; v1(115.57,63.881) 115.57,64.389 ; v1@115.721,64.048 cw(c116.031,64.389) 115.57,64.389 ; v1@119.729,50.514 cw(c119.345,50.13) 119.888,50.13 cw(c120.431,50.13) v1@120.047,50.514
PA14: P1.4 P6.13 P6.14 R54.1 U1.49 | length 134
  Top Layer w0.25: P1.4@77.851,110.617 79.608,110.617 80.751,109.474 80.751,98.766 82.804,96.713 82.804,95.758 P6.13@82.804,93.472 P6.14@82.804,90.932 ; P1.4@78.116,110.352 cw(c78.756,109.712) 78.756,110.617 cw(c78.756,111.522) P1.4@78.116,110.882 ; P1.4@78.293,110.175 cw(c79.36,109.108) 79.36,110.617 cw(c79.36,112.126) P1.4@78.293,111.059 ; P6.14@82.362,91.374 ccw(c81.295,92.441) 82.804,92.441 ccw(c84.313,92.441) P6.14@83.246,91.374 ; P6.13@82.362,93.03 cw(c81.295,91.963) 82.804,91.963 cw(c84.313,91.963) P6.13@83.246,93.03 ; P6.13@82.362,93.914 ccw(c81.295,94.981) 82.804,94.981 ccw(c84.313,94.981) P6.13@83.246,93.914 ; P6.14@82.539,91.197 ccw(c81.899,91.837) 82.804,91.837 ccw(c83.709,91.837) P6.14@83.069,91.197 ; P6.13@82.539,93.207 cw(c81.899,92.567) 82.804,92.567 cw(c83.709,92.567) P6.13@83.069,93.207 ; P6.13@82.539,93.737 ccw(c81.899,94.377) 82.804,94.377 ccw(c83.709,94.377) P6.13@83.069,93.737
  Top Layer w0.254: U1.49@73.248,80.676 72.55,81.374 72.55,82.009 72.669,82.128 72.669,86.041 73.725,87.097 80.747,87.097 82.804,89.154 P6.14@82.804,90.932 ; P6.14@82.363,90.491 cw(c81.3,89.428) 82.804,89.428 cw(c84.308,89.428) P6.14@83.245,90.491 ; P6.14@82.543,90.671 cw(c81.913,90.041) 82.804,90.041 cw(c83.695,90.041) P6.14@83.065,90.671 ; 82.804,95.758 v1(83.439,95.758) ; v1@85.948,97.694 ccw(c85.568,98.074) 86.106,98.074 ccw(c86.644,98.074) v1@86.264,97.694 ; v1(86.106,97.536) 86.106,98.171 v1(87.884,99.949) ; v1@87.661,99.949 cw(c87.123,99.949) 87.503,99.568 cw(c87.884,99.188) v1@87.884,99.726 ; v1(93.218,99.949) 94.234,99.949 99.441,94.742 99.441,85.598 100.584,84.455 104.775,84.455 109.601,79.629 v1(109.601,73.533) ; v1@93.376,99.791 cw(c93.756,99.411) 93.756,99.949 cw(c93.756,100.487) v1@93.376,100.107 ; v1@109.443,73.691 ccw(c109.063,74.071) 109.601,74.071 ccw(c110.139,74.071) v1@109.759,73.691
  Bottom Layer w0.254: v1(83.439,95.758) 85.725,95.758 86.106,96.139 v1(86.106,97.536) ; v1@83.597,95.6 cw(c83.977,95.22) 83.977,95.758 cw(c83.977,96.296) v1@83.597,95.916 ; v1@85.948,97.378 cw(c85.568,96.998) 86.106,96.998 cw(c86.644,96.998) v1@86.264,97.378 ; v1(87.884,99.949) v1(93.218,99.949) ; v1@88.042,99.791 cw(c88.422,99.411) 88.422,99.949 cw(c88.422,100.487) v1@88.042,100.107 ; v1@93.06,99.791 ccw(c92.68,99.411) 92.68,99.949 ccw(c92.68,100.487) v1@93.06,100.107 ; v1@109.443,73.375 cw(c109.063,72.995) 109.601,72.995 cw(c110.139,72.995) v1@109.759,73.375 ; 109.601,59.658 ccw(c110.343,59.658) R54.1@109.818,59.133 ; 109.601,60.272 ccw(c110.957,60.272) R54.1@109.998,59.313 ; v1(109.601,73.533) 109.601,59.374 R54.1@109.855,59.12 R54.1@109.844,59.131
PA15: J3.5 K4.2 P6.15 P6.16 U1.50 | length 206.5
  Top Layer w0.25: P6.16@79.822,91.374 ccw(c78.755,92.441) 80.264,92.441 ccw(c81.773,92.441) P6.16@80.706,91.374 ; P6.15@79.822,93.03 cw(c78.755,91.963) 80.264,91.963 cw(c81.773,91.963) P6.15@80.706,93.03 ; P6.16@79.999,91.197 ccw(c79.359,91.837) 80.264,91.837 ccw(c81.169,91.837) P6.16@80.529,91.197 ; P6.15@79.999,93.207 cw(c79.359,92.567) 80.264,92.567 cw(c81.169,92.567) P6.15@80.529,93.207 ; P6.16@80.264,90.932 P6.15@80.264,93.472
  Top Layer w0.254: J3.5@71.216,31.465 cw(c69.915,30.164) 71.755,30.164 cw(c73.595,30.164) J3.5@72.294,31.465 ; J3.5@71.396,31.645 cw(c70.529,30.778) 71.755,30.778 cw(c72.981,30.778) J3.5@72.114,31.645 ; J3.5@71.755,32.385 71.755,28.194 73.914,26.035 109.728,26.035 111.506,27.813 K4.2@111.506,29.972 115.824,34.29 115.824,39.116 118.516,41.808 118.516,46.203 115.316,49.403 ; U1.50@72.895,80.323 72.073,81.144 72.073,82.106 72.263,82.296 72.263,86.21 73.556,87.503 78.232,87.503 80.264,89.535 ; P6.15@79.823,93.913 ccw(c78.76,94.976) 80.264,94.976 ccw(c81.768,94.976) P6.15@80.705,93.913 ; P6.16@79.848,90.468 cw(c79.009,89.535) 80.264,89.535 ; P6.15@80.003,93.733 ccw(c79.373,94.363) 80.264,94.363 ccw(c81.155,94.363) P6.15@80.525,93.733 ; P6.16@80.017,90.657 cw(c79.521,90.105) 80.264,90.105 cw(c81.007,90.105) P6.16@80.511,90.657 ; v1@80.106,96.108 cw(c79.726,95.728) 80.264,95.728 cw(c80.802,95.728) v1@80.422,96.108 ; P6.16@80.264,90.932 80.264,89.535 ; P6.15@80.264,93.472 v1(80.264,96.266) ; P6.16@80.68,90.468 ccw(c81.519,89.535) 80.264,89.535 ; v1@110.078,74.326 ccw(c109.698,74.706) 110.236,74.706 ccw(c110.774,74.706) v1@110.394,74.326 ; v1@110.078,91.536 cw(c109.698,91.156) 110.236,91.156 cw(c110.774,91.156) v1@110.394,91.536 ; v1(110.236,74.168) v1(110.236,91.694) ; K4.2@111.012,29.478 cw(c109.818,28.284) 111.506,28.284 cw(c113.194,28.284) K4.2@112,29.478 ; K4.2@111.191,29.657 cw(c110.431,28.897) 111.506,28.897 cw(c112.581,28.897) K4.2@111.821,29.657 ; K4.2@111.506,30.417 ccw(c111.506,31.492) 112.266,30.732 ccw(c113.026,29.972) K4.2@111.951,29.972 ; K4.2@111.506,30.671 ccw(c111.506,32.359) 112.7,31.166 ccw(c113.893,29.972) K4.2@112.205,29.972 ; v1@115.165,49.747 cw(c114.849,49.403) 115.316,49.403 ; v1(115.316,49.911) 115.316,49.403 ; v1@115.467,49.747 ccw(c115.783,49.403) 115.316,49.403
  Bottom Layer w0.254: v1(80.264,96.266) 82.169,98.171 103.759,98.171 v1(110.236,91.694) ; v1@80.264,96.489 ccw(c80.264,97.027) 80.645,96.647 ccw(c81.025,96.266) v1@80.487,96.266 ; v1@110.013,91.694 ccw(c109.475,91.694) 109.855,92.075 ccw(c110.236,92.455) v1@110.236,91.917 ; v1@110.078,74.01 cw(c109.698,73.63) 110.236,73.63 cw(c110.774,73.63) v1@110.394,74.01 ; v1(110.236,74.168) 110.236,66.294 110.251,66.279 110.251,62.315 112.522,60.044 112.522,53.34 115.316,50.546 v1(115.316,49.911) ; v1@115.158,50.069 ccw(c114.778,50.449) 115.316,50.449 ccw(c115.854,50.449) v1@115.474,50.069
PB1: P4.3 P4.4 U1.27 | length 29.1
  Top Layer w0.25: U1.27@79.259,71.13 80.51,69.879 87.22,69.879 93.091,64.008 ; P4.4@93.549,63.726 ccw(c93.091,63.495) 93.091,64.008 ; P4.4@93.549,64.29 cw(c93.091,64.521) 93.091,64.008 ; P4.4@94.372,63.743 cw(c95.012,63.103) 95.012,64.008 cw(c95.012,64.913) P4.4@94.372,64.273 ; P4.4@94.549,63.566 cw(c95.616,62.499) 95.616,64.008 cw(c95.616,65.517) P4.4@94.549,64.45 ; P4.3@96.205,63.566 ccw(c95.138,62.499) 95.138,64.008 ccw(c95.138,65.517) P4.3@96.205,64.45 ; P4.3@96.382,63.743 ccw(c95.742,63.103) 95.742,64.008 ccw(c95.742,64.913) P4.3@96.382,64.273 ; P4.3@96.647,64.008 P4.4@94.107,64.008 93.091,64.008
PB3: P8.1 P8.2 U1.55 | length 33.7
  Top Layer w0.25: U1.55@71.127,78.555 67.966,81.715 67.966,86.127 69.85,88.011 74.93,88.011 76.454,89.535 ; P8.2@76.012,91.374 ccw(c74.945,92.441) 76.454,92.441 ccw(c77.963,92.441) P8.2@76.896,91.374 ; P8.1@76.012,93.03 cw(c74.945,91.963) 76.454,91.963 cw(c77.963,91.963) P8.1@76.896,93.03 ; P8.2@76.037,90.466 cw(c75.205,89.535) 76.454,89.535 ; P8.2@76.189,91.197 ccw(c75.549,91.837) 76.454,91.837 ccw(c77.359,91.837) P8.2@76.719,91.197 ; P8.1@76.189,93.207 cw(c75.549,92.567) 76.454,92.567 cw(c77.359,92.567) P8.1@76.719,93.207 ; P8.2@76.204,90.652 cw(c75.705,90.094) 76.454,90.094 cw(c77.203,90.094) P8.2@76.704,90.652 ; P8.1@76.454,93.472 P8.2@76.454,90.932 76.454,89.535 ; P8.2@76.871,90.466 ccw(c77.703,89.535) 76.454,89.535
PB4: P8.3 P8.4 U1.56 | length 32.1
  Top Layer w0.25: U1.56@70.773,78.201 67.564,81.411 67.564,86.487 69.596,88.519 72.898,88.519 73.914,89.535 ; P8.4@73.472,91.374 ccw(c72.405,92.441) 73.914,92.441 ccw(c75.423,92.441) P8.4@74.356,91.374 ; P8.3@73.472,93.03 cw(c72.405,91.963) 73.914,91.963 cw(c75.423,91.963) P8.3@74.356,93.03 ; P8.4@73.497,90.466 cw(c72.665,89.535) 73.914,89.535 ; P8.4@73.649,91.197 ccw(c73.009,91.837) 73.914,91.837 ccw(c74.819,91.837) P8.4@74.179,91.197 ; P8.3@73.649,93.207 cw(c73.009,92.567) 73.914,92.567 cw(c74.819,92.567) P8.3@74.179,93.207 ; P8.4@73.664,90.652 cw(c73.165,90.094) 73.914,90.094 cw(c74.663,90.094) P8.4@74.164,90.652 ; P8.3@73.914,93.472 P8.4@73.914,90.932 73.914,89.535 ; P8.4@74.331,90.466 ccw(c75.163,89.535) 73.914,89.535
PB8: P8.11 P8.12 U1.61 U2.4 | length 89.1
  Top Layer w0.25: U2.4@37.179,110.242 ccw(c36.795,110.626) 37.338,110.626 ccw(c37.881,110.626) U2.4@37.497,110.242 ; U2.4@37.338,109.183 37.338,111.76 37.973,112.395 39.751,112.395 40.64,111.506 40.64,108.839 39.624,107.823 v1(39.624,103.505) ; v1@39.465,100.108 ccw(c39.081,100.492) 39.624,100.492 ccw(c40.167,100.492) v1@39.783,100.108 ; v1@39.465,101.568 cw(c39.081,101.184) 39.624,101.184 cw(c40.167,101.184) v1@39.783,101.568 ; v1@39.465,103.664 ccw(c39.081,104.048) 39.624,104.048 ccw(c40.167,104.048) v1@39.783,103.664 ; v1(39.624,99.949) v1(39.624,101.727) ; v1(50.673,96.774) 62.611,96.774 63.754,95.631 P8.11@63.754,93.472 P8.12@63.754,90.932 ; v1@50.832,96.615 cw(c51.216,96.231) 51.216,96.774 cw(c51.216,97.317) v1@50.832,96.933 ; P8.12@63.312,91.374 ccw(c62.245,92.441) 63.754,92.441 ccw(c65.263,92.441) P8.12@64.196,91.374 ; P8.11@63.312,93.03 cw(c62.245,91.963) 63.754,91.963 cw(c65.263,91.963) P8.11@64.196,93.03 ; P8.11@63.312,93.914 ccw(c62.245,94.981) 63.754,94.981 ccw(c65.263,94.981) P8.11@64.196,93.914 ; P8.12@63.489,91.197 ccw(c62.849,91.837) 63.754,91.837 ccw(c64.659,91.837) P8.12@64.019,91.197 ; P8.11@63.489,93.207 cw(c62.849,92.567) 63.754,92.567 cw(c64.659,92.567) P8.11@64.019,93.207 ; P8.11@63.489,93.737 ccw(c62.849,94.377) 63.754,94.377 ccw(c64.659,94.377) P8.11@64.019,93.737
  Top Layer w0.254: P8.12@63.313,90.491 cw(c62.25,89.428) 63.754,89.428 cw(c65.258,89.428) P8.12@64.195,90.491 ; P8.12@63.493,90.671 cw(c62.863,90.041) 63.754,90.041 cw(c64.645,90.041) P8.12@64.015,90.671 ; P8.12@63.754,90.932 63.754,81.685 U1.61@69.006,76.433
  Bottom Layer w0.25: v1@39.465,99.79 cw(c39.081,99.406) 39.624,99.406 cw(c40.167,99.406) v1@39.783,99.79 ; v1@39.465,101.886 ccw(c39.081,102.27) 39.624,102.27 ccw(c40.167,102.27) v1@39.783,101.886 ; v1@39.465,103.346 cw(c39.081,102.962) 39.624,102.962 cw(c40.167,102.962) v1@39.783,103.346 ; v1(39.624,99.949) 39.624,99.06 41.91,96.774 v1(50.673,96.774) ; v1(39.624,101.727) v1(39.624,103.505) ; v1@50.514,96.615 ccw(c50.13,96.231) 50.13,96.774 ccw(c50.13,97.317) v1@50.514,96.933